# EAGLE board tc (EAGLE 7.1.0)

Size 104.14 x 165.1 mm. Coordinates in mm from the lower left corner, seen from the top.
Copper layers (1*16): Top 0.035mm / dielectric 1.5mm / Bottom 0.035mm
Design rules "default": minimum track width 10mil, minimum drill 24mil, track to track 8mil, track to pad 8mil, pad to pad 8mil, via to via 8mil, smd to smd 8mil, copper to edge 40mil, drill to drill 8mil, minimum pad ring 10mil, minimum via ring 8mil, stop-mask expansion 4mil, vias tented up to drill 0mil, thermal gap 10mil

## Footprints (pad centres in the part's own frame; a part is rotated, then mirrored left to right if it is on the bottom)
C025-025X050 = drill 0.813 octagon: 1 -1.27,0; 2 1.27,0
DIP254P762X457-28 = drill 1.118 square: 1 -7.62,33.02 | drill 1.118: 2 -7.62,30.48; 3 -7.62,27.94; 4 -7.62,25.4; 5 -7.62,22.86; 6 -7.62,20.32; 7 -7.62,17.78; 8 -7.62,15.24; 9 -7.62,12.7; 10 -7.62,10.16; 11 -7.62,7.62; 12 -7.62,5.08; 13 -7.62,2.54; 14 -7.62,0; 15 0,0; 16 0,2.54; 17 0,5.08; 18 0,7.62; 19 0,10.16; 20 0,12.7; 21 0,15.24; 22 0,17.78; 23 0,20.32; 24 0,22.86; 25 0,25.4; 26 0,27.94; 27 0,30.48; 28 0,33.02
ARDUINO_MICRO = drill 1.016 pad 1.575: 3V3 6.35,1.27; +5V 31.75,1.27; A0 11.43,1.27; A1 13.97,1.27; A2 16.51,1.27; A3 19.05,1.27; A4 21.59,1.27; A5 24.13,1.27; D2 29.21,16.51; D3 26.67,16.51; D4 24.13,16.51; D5 21.59,16.51; D6 19.05,16.51; D7 16.51,16.51; D8 13.97,16.51; D9 11.43,16.51; D10 8.89,16.51; D11 6.35,16.51; D12 3.81,16.51; D13 3.81,1.27; GND 31.75,16.51; GND. 36.83,1.27; MISO] 41.91,1.27; MOSI 44.45,16.51; NC 26.67,1.27; NC. 29.21,1.27; REF 8.89,1.27; RST 34.29,16.51; RST. 34.29,1.27; RX1 36.83,16.51; SCK 44.45,1.27; SS 41.91,16.51; TX1 39.37,16.51; VIN 39.37,1.27 | drill 1.016 pad 1.575 octagon: 5V 40.64,6.477; GND_ 45.72,6.477; MISO. 40.64,3.937; MOSI. 43.18,6.477; RESET.. 45.72,3.937; SCK. 43.18,3.937 | smd 1.27 x 0.635: <USB>+V 3.15,10.947; <USB>D+ 3.15,9.957; <USB>D- 3.15,8.941; <USB>GND 3.15,6.96; <USB>ID 3.15,7.976 | hole 1.2: 1.27,1.27; 1.27,16.51; 46.99,16.51; 46.99,1.27
2X06 = drill 1.016 octagon: 1 -6.35,-1.27; 2 -6.35,1.27; 3 -3.81,-1.27; 4 -3.81,1.27; 5 -1.27,-1.27; 6 -1.27,1.27; 7 1.27,-1.27; 8 1.27,1.27; 9 3.81,-1.27; 10 3.81,1.27; 11 6.35,-1.27; 12 6.35,1.27
ARDUINO_MEGA2560 = drill 1.016 pad 1.88: 0 63.5,50.8; 1 60.96,50.8; 2 58.42,50.8; 3 55.88,50.8; 3.3V 35.56,2.54; 4 53.34,50.8; 5 50.8,50.8; 5V 38.1,2.54; 5V. 93.98,50.8; 5V.. 96.52,50.8; 6 48.26,50.8; 7 45.72,50.8; 8 41.656,50.8; 9 39.116,50.8; 10 36.576,50.8; 11 34.036,50.8; 12 31.496,50.8; 13 28.956,50.8; 14 68.58,50.8; 15 71.12,50.8; 16 73.66,50.8; 17 76.2,50.8; 18 78.74,50.8; 19 81.28,50.8; 20 83.82,50.8; 21 86.36,50.8; A0 50.8,2.54; A1 53.34,2.54; A2 55.88,2.54; A3 58.42,2.54; A4 60.96,2.54; A5 63.5,2.54; A6 66.04,2.54; A7 68.58,2.54; A8 73.66,2.54; A9 76.2,2.54; A10 78.74,2.54; A11 81.28,2.54; A12 83.82,2.54; A13 86.36,2.54; A14 88.9,2.54; A15 91.44,2.54; AREF 23.876,50.8; GND 26.416,50.8; GND. 43.18,2.54; GND.. 40.64,2.54; GND... 93.98,7.62; GND.... 96.52,7.62; I/OREF 30.48,2.54; N/C 27.94,2.54; RESET 33.02,2.54; SCL1 18.796,50.8; SDA1 21.336,50.8; VIN 45.72,2.54 | drill 1.016 pad 1.88 octagon: 22 93.98,48.26; 23 96.52,48.26; 24 93.98,45.72; 25 96.52,45.72; 26 93.98,43.18; 27 96.52,43.18; 28 93.98,40.64; 29 96.52,40.64; 30 93.98,38.1; 31 96.52,38.1; 32 93.98,35.56; 33 96.52,35.56; 34 93.98,33.02; 35 96.52,33.02; 36 93.98,30.48; 37 96.52,30.48; 38 93.98,27.94; 39 96.52,27.94; 40 93.98,25.4; 41 96.52,25.4; 42 93.98,22.86; 43 96.52,22.86; 44 93.98,20.32; 45 96.52,20.32; 46 93.98,17.78; 47 96.52,17.78; 48 93.98,15.24; 49 96.52,15.24; 50 93.98,12.7; 51 96.52,12.7; 52 93.98,10.16; 53 96.52,10.16; +5V_ 66.04,30.48; GND__ 66.04,25.4; MISO 63.5,30.48; MOSI 66.04,27.94; RESET. 63.5,25.4; SCK 63.5,27.94 | smd 1.016 x 0.508: <PWR>+V 3.81,8.89; <PWR>-V 3.81,6.35; <USB>+V 2.54,40.64; <USB>D+ 2.54,39.37; <USB>D- 2.54,36.83; <USB>GND 2.54,35.56 | hole 3.2: 15.24,50.8; 13.97,2.54; 66.04,35.56; 66.04,7.62; 90.17,50.8; 96.52,2.54
HC49U70 = drill 0.813: 1 -2.413,0; 2 2.413,0
1X02 = drill 1.016 long: 1 -1.27,0; 2 1.27,0

## Placement (x,y rotation side)
C1  22pF  [C025-025X050]  85.09,168.91 0 top  (outside the outline)
C2  22pF  [C025-025X050]  78.74,168.91 0 top  (outside the outline)
C3  22pF  [C025-025X050]  72.39,168.91 0 top  (outside the outline)
C4  22pF  [C025-025X050]  66.04,168.91 0 top  (outside the outline)
C5  22pF  [C025-025X050]  59.69,168.91 0 top  (outside the outline)
C6  22pF  [C025-025X050]  53.34,168.91 0 top  (outside the outline)
C7  22pF  [C025-025X050]  46.99,168.91 0 top  (outside the outline)
C8  22pF  [C025-025X050]  40.64,168.91 0 top  (outside the outline)
C9  22pF  [C025-025X050]  34.29,168.91 0 top  (outside the outline)
C10  22pF  [C025-025X050]  27.94,168.91 0 top  (outside the outline)
C11  22pF  [C025-025X050]  21.59,168.91 0 top  (outside the outline)
C12  22pF  [C025-025X050]  15.24,168.91 0 top  (outside the outline)
CLB  ATMEGA328P-PU  [DIP254P762X457-28]  86.36,60.96 0 top
CLF  ATMEGA328P-PU  [DIP254P762X457-28]  58.42,60.96 0 top
CLL  ATMEGA328P-PU  [DIP254P762X457-28]  30.48,60.96 0 top
CLR  ATMEGA328P-PU  [DIP254P762X457-28]  2.54,60.96 0 top
CS  ATMEGA328P-PU  [DIP254P762X457-28]  86.36,106.68 0 top
IR  ARDUINO_MICRO  [ARDUINO_MICRO]  0,101.6 0 top
IRPIN  [2X06]  96.52,168.91 0 top
LN  ATMEGA328P-PU  [DIP254P762X457-28]  58.42,106.68 0 top
MASTER  ARDUINO_MEGA2560  [ARDUINO_MEGA2560]  2.54,0 0 top
PIXY  ARDUINO_MICRO  [ARDUINO_MICRO]  55.88,147.32 0 top
Q1  [HC49U70]  48.26,149.86 0 top
Q2  [HC49U70]  35.56,149.86 0 top
Q3  [HC49U70]  22.86,149.86 0 top
Q4  [HC49U70]  10.16,149.86 0 top
Q5  [HC49U70]  -2.54,149.86 0 top
Q6  [HC49U70]  -15.24,149.86 0 top  (outside the outline)
ULTRASONICO  [1X02]  1.27,167.64 0 top

## Library data of the parts
C1-C12 = rcl
CLB CLF CLL CLR CS LN = Atmel_By_element14_Batch_1-00; MPN: ATMEGA328P-PU; OC_FARNELL: 1715487; OC_NEWARK: 15R0268; PACKAGE: PDIP-28; SUPPLIER: Atmel
IR MASTER PIXY = E14_Arduino_revB
IRPIN ULTRASONICO = pinhead
Q1-Q6 = crystal; OC_FARNELL: unknown; OC_NEWARK: unknown

## Nets
+5V: CLB.7 CLB.20 CLF.7 CLF.20 CLL.7 CLL.20 CLR.7 CLR.20 CS.7 CS.20 LN.7 LN.20
GND: C1.1 C2.1 C3.1 C4.1 C5.1 C6.1 C7.1 C8.1 C9.1 C10.1 C11.1 C12.1 CLB.8 CLB.22 CLF.8 CLF.22 CLL.8 CLL.22 CLR.8 CLR.22 CS.8 CS.22 IR.GND IR.GND. LN.8 LN.22 MASTER.GND MASTER.GND. MASTER.GND.. PIXY.GND PIXY.GND.
N$1: CLL.10 Q1.2
N$2: CLL.9 Q1.1
N$3: CLB.10 Q4.2
N$4: CLB.9 Q4.1
N$5: CLR.10 Q3.2
N$6: CLR.9 Q3.1
N$7: CLF.10 Q2.2
N$8: CLF.9 Q2.1
N$9: LN.10 Q5.2
N$10: LN.9 Q5.1
N$11: CLL.15 LN.13
N$12: CLB.18 LN.12
N$13: CLF.18 LN.18
N$14: CLR.16 LN.17
N$15: PIXY.D12 ULTRASONICO.1
N$16: PIXY.D11 ULTRASONICO.2
N$17: C2.2 CS.10 Q6.2
N$18: C1.2 CS.9 Q6.1
RX-CM: MASTER.0
RX-CS: CS.2 MASTER.17
RX-IR: IR.RX1 MASTER.19
RX-LN: LN.2 MASTER.15
SCL: CLF.28 CLL.28 CS.28 IR.D3 LN.28 MASTER.SCL1 PIXY.D3
SDA: CLF.27 CLL.27 CS.27 IR.D2 LN.27 MASTER.SDA1 PIXY.D2
TSOP0: IR.A0 IRPIN.1
TSOP1: IR.A1 IRPIN.2
TSOP2: IR.A2 IRPIN.3
TSOP3: IR.A3 IRPIN.4
TSOP4: IR.A4 IRPIN.5
TSOP5: IR.A5 IRPIN.6
TSOP6: IR.D4 IRPIN.7
TSOP7: IR.D6 IRPIN.8
TSOP8: IR.D8 IRPIN.9
TSOP9: IR.D9 IRPIN.10
TSOP10: IR.D10 IRPIN.11
TSOP11: IR.D12 IRPIN.12
TX-CM: MASTER.1
TX-CS: CS.3 MASTER.16
TX-IR: IR.TX1 MASTER.18
TX-LN: LN.3 MASTER.14
VCC: IR.VIN MASTER.VIN PIXY.VIN

## Tracks (layer width: path | path; a pad name or v marks a point on that pad's centre or on a via)
+5V  (11 unrouted)
GND  (30 unrouted)
N$1  (1 unrouted)
N$2  (1 unrouted)
N$3  (1 unrouted)
N$4  (1 unrouted)
N$5  (1 unrouted)
N$6  (1 unrouted)
N$7  (1 unrouted)
N$8  (1 unrouted)
N$9  (1 unrouted)
N$10  (1 unrouted)
N$11  (1 unrouted)
N$12  (1 unrouted)
N$13  (1 unrouted)
N$14  (1 unrouted)
N$15  (1 unrouted)
N$16  (1 unrouted)
N$17  (2 unrouted)
N$18  (2 unrouted)
RX-CS  (1 unrouted)
RX-IR  (1 unrouted)
RX-LN  (1 unrouted)
SCL  (6 unrouted)
SDA  (6 unrouted)
TSOP0  (1 unrouted)
TSOP1  (1 unrouted)
TSOP2  (1 unrouted)
TSOP3  (1 unrouted)
TSOP4  (1 unrouted)
TSOP5  (1 unrouted)
TSOP6  (1 unrouted)
TSOP7  (1 unrouted)
TSOP8  (1 unrouted)
TSOP9  (1 unrouted)
TSOP10  (1 unrouted)
TSOP11  (1 unrouted)
TX-CS  (1 unrouted)
TX-IR  (1 unrouted)
TX-LN  (1 unrouted)
VCC  (2 unrouted)